# EAGLE board bb2 (EAGLE 6.5.0)
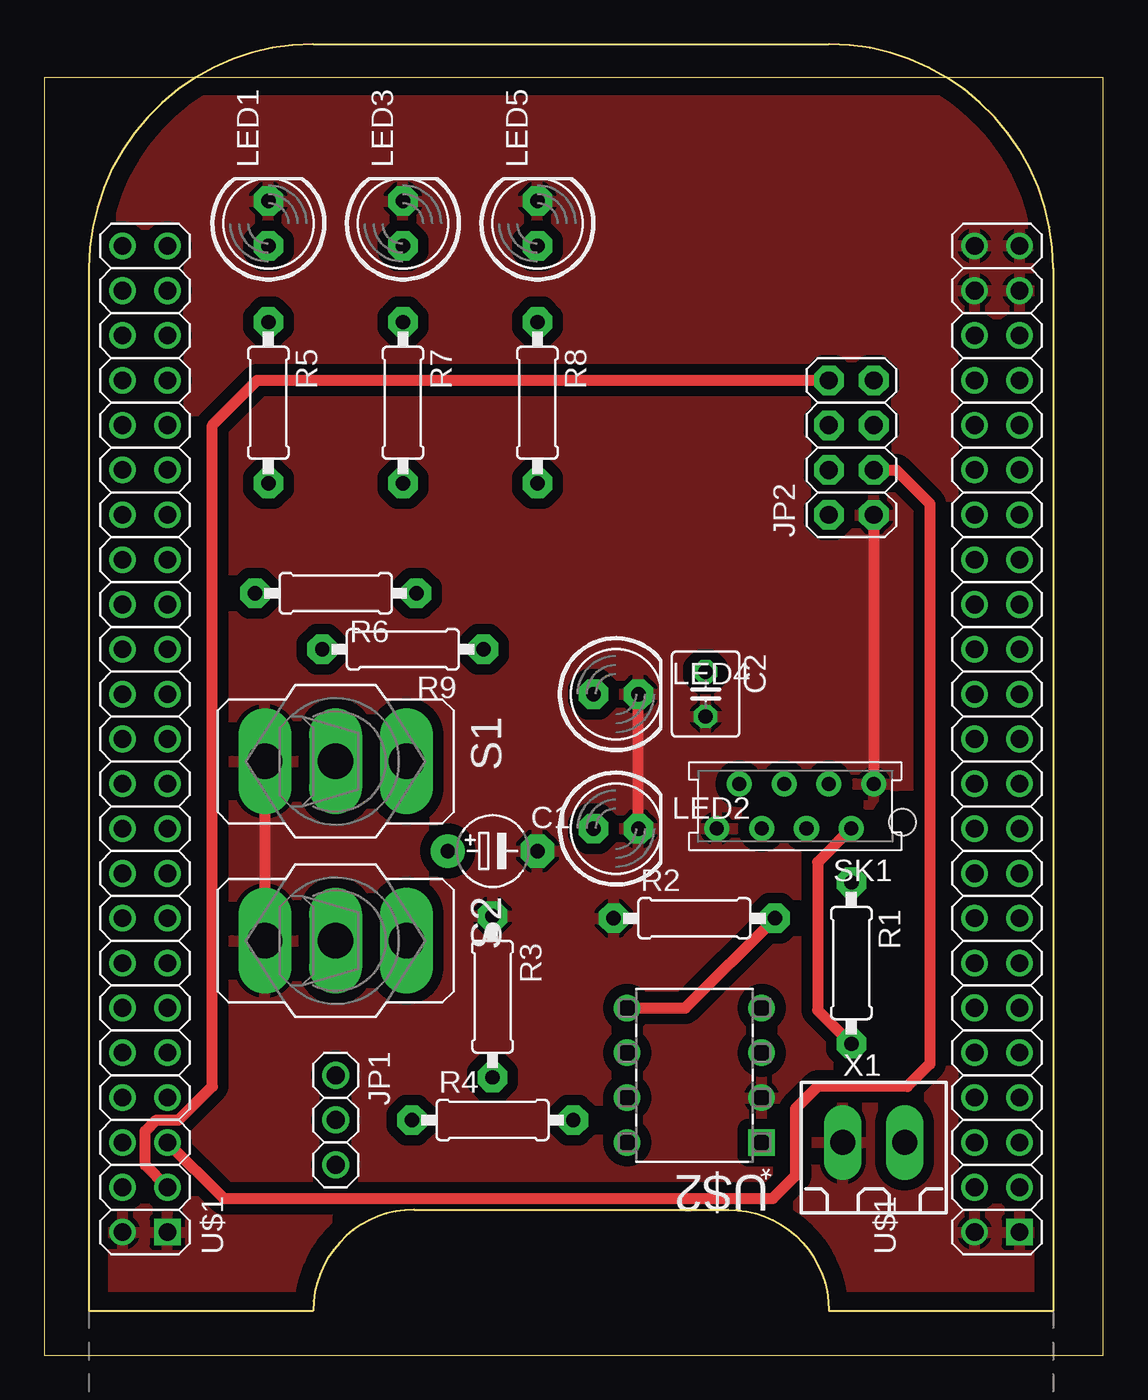
[diagram p0: board, top side]
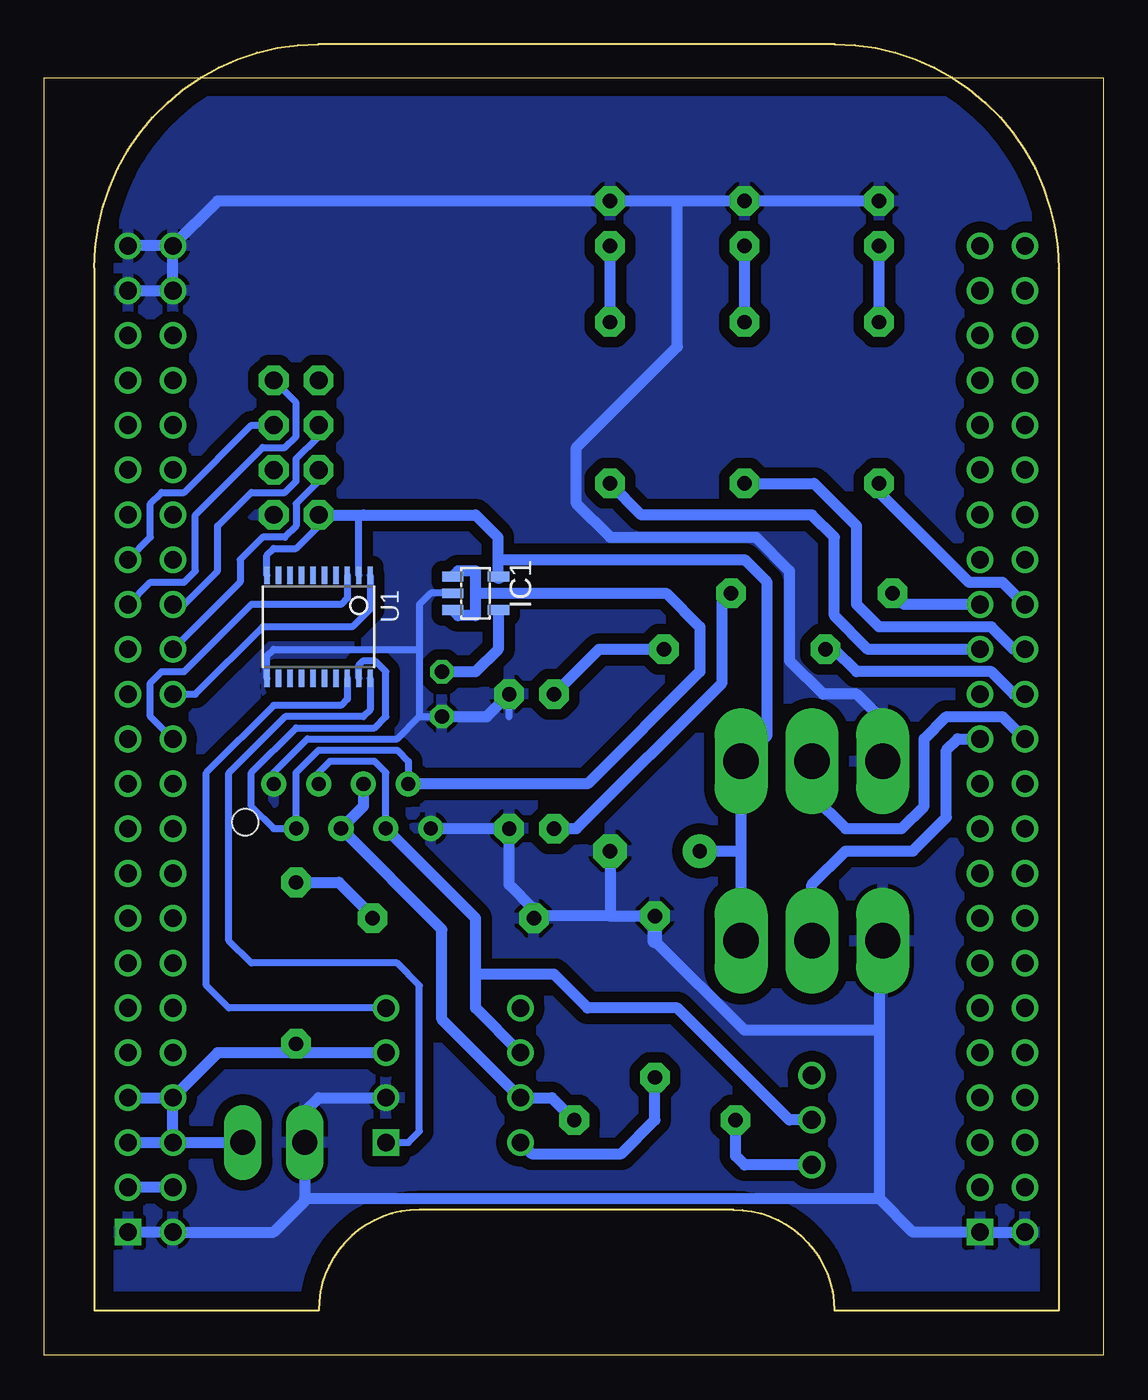
[diagram p1: board, bottom side, seen from below]

Size 59.99 x 72.38 mm. Coordinates in mm from the lower left corner, seen from the top.
Outline: 0,0 59.99,0 59.99,72.38 0,72.38 0,0
Copper layers (1*16): Top 0.035mm / dielectric 1.5mm / Bottom 0.035mm
Design rules "default": minimum track width 10mil, minimum drill 24mil, track to track 8mil, track to pad 8mil, pad to pad 8mil, via to via 8mil, smd to smd 8mil, copper to edge 40mil, drill to drill 8mil, minimum pad ring 10mil, minimum via ring 8mil, stop-mask expansion 4mil, vias tented up to drill 0mil, thermal gap 10mil

## Footprints (pad centres in the part's own frame; a part is rotated, then mirrored left to right if it is on the bottom)
E5-4 = drill 0.813 pad 1.905: + -2.54,0 | drill 0.813 pad 1.905 octagon: - 2.54,0
C025-040X050 = drill 0.813 octagon: 1 -1.27,0; 2 1.27,0
SOT23-5 = smd 0.55 x 1.2: 1 -0.95,-1.3; 2 0,-1.3; 3 0.95,-1.3; 4 0.95,1.3; 5 -0.95,1.3
1X03 = drill 1.016: 1 -2.54,0; 2 0,0; 3 2.54,0
2X04 = drill 1.016 pad 1.676 octagon: 1 -3.81,-1.27; 2 -3.81,1.27; 3 -1.27,-1.27; 4 -1.27,1.27; 5 1.27,-1.27; 6 1.27,1.27; 7 3.81,-1.27; 8 3.81,1.27
LED5MM = drill 0.813 pad 1.676 octagon: A -1.27,0; K 1.27,0
0207/9 = drill 0.813 pad 1.676 octagon: 1 -4.572,0; 2 4.572,0
320-916 = drill 2.007 long: 1 0,4.013; 2 0,0; 3 0,-4.013
AMP-215079-8 = drill 0.8 pad 1.422: 1 0,-1.27; 2 1.27,1.27; 3 2.54,-1.27; 4 3.81,1.27; 5 5.08,-1.27; 6 6.35,1.27; 7 7.62,-1.27; 8 8.89,1.27 | hole 1.5: -1.62,0.905
TSSOP20 = smd 0.305 x 0.991: 1 -2.925,-2.918; 2 -2.275,-2.918; 3 -1.625,-2.918; 4 -0.975,-2.918; 5 -0.325,-2.918; 6 0.325,-2.918; 7 0.975,-2.918; 8 1.625,-2.918; 9 2.275,-2.918; 10 2.925,-2.918; 11 2.925,2.918; 12 2.275,2.918; 13 1.625,2.918; 14 0.975,2.918; 15 0.325,2.918; 16 -0.325,2.918; 17 -0.975,2.918; 18 -1.625,2.918; 19 -2.275,2.918; 20 -2.925,2.918
BEAGLEBONE_SHIELD = drill 1 square: 1 4.445,19.05; 47 52.705,19.05 | drill 1: 2 1.905,19.05; 3 4.445,21.59; 4 1.905,21.59; 5 4.445,24.13; 6 1.905,24.13; 7 4.445,26.67; 8 1.905,26.67; 9 4.445,29.21; 10 1.905,29.21; 11 4.445,31.75; 12 1.905,31.75; 13 4.445,34.29; 14 1.905,34.29; 15 4.445,36.83; 16 1.905,36.83; 17 4.445,39.37; 18 1.905,39.37; 19 4.445,41.91; 20 1.905,41.91; 21 4.445,44.45; 22 1.905,44.45; 23 4.445,46.99; 24 1.905,46.99; 25 4.445,49.53; 26 1.905,49.53; 27 4.445,52.07; 28 1.905,52.07; 29 4.445,54.61; 30 1.905,54.61; 31 4.445,57.15; 32 1.905,57.15; 33 4.445,59.69; 34 1.905,59.69; 35 4.445,62.23; 36 1.905,62.23; 37 4.445,64.77; 38 1.905,64.77; 39 4.445,67.31; 40 1.905,67.31; 41 4.445,69.85; 42 1.905,69.85; 43 4.445,72.39; 44 1.905,72.39; 45 4.445,74.93; 46 1.905,74.93; 48 50.165,19.05; 49 52.705,21.59; 50 50.165,21.59; 51 52.705,24.13; 52 50.165,24.13; 53 52.705,26.67; 54 50.165,26.67; 55 52.705,29.21; 56 50.165,29.21; 57 52.705,31.75; 58 50.165,31.75; 59 52.705,34.29; 60 50.165,34.29; 61 52.705,36.83; 62 50.165,36.83; 63 52.705,39.37; 64 50.165,39.37; 65 52.705,41.91; 66 50.165,41.91; 67 52.705,44.45; 68 50.165,44.45; 69 52.705,46.99; 70 50.165,46.99; 71 52.705,49.53; 72 50.165,49.53; 73 52.705,52.07; 74 50.165,52.07; 75 52.705,54.61; 76 50.165,54.61; 77 52.705,57.15; 78 50.165,57.15; 79 52.705,59.69; 80 50.165,59.69; 81 52.705,62.23; 82 50.165,62.23; 83 52.705,64.77; 84 50.165,64.77; 85 52.705,67.31; 86 50.165,67.31; 87 52.705,69.85; 88 50.165,69.85; 89 52.705,72.39; 90 50.165,72.39; 91 52.705,74.93; 92 50.165,74.93
DIP254P762X432-8 = drill 0.991 square: 1 -7.62,7.62 | drill 0.991: 2 -7.62,5.08; 3 -7.62,2.54; 4 -7.62,0; 5 0,0; 6 0,2.54; 7 0,5.08; 8 0,7.62
180G-2 = drill 1.422 long: 1 -1.75,0; 2 1.75,0

## Placement (x,y rotation side)
C1  2.2u  [E5-4]  25.4,28.58 0 top
C2  470p  [C025-040X050]  37.47,37.47 270 top
IC1  MIC5219BM5  [SOT23-5]  35.56,43.18 270 bottom
JP1  [1X03]  16.51,13.34 270 top
JP2  [2X04]  45.72,51.44 90 top
LED1  [LED5MM]  12.7,64.14 90 top
LED2  [LED5MM]  32.38,29.84 0 top
LED3  [LED5MM]  20.32,64.14 90 top
LED4  [LED5MM]  32.38,37.47 0 top
LED5  [LED5MM]  27.94,64.14 90 top
R1  47k  [0207/9]  45.72,22.23 270 top
R2  47k  [0207/9]  36.83,24.77 0 top
R3  4.7k  [0207/9]  25.4,20.32 270 top
R4  120  [0207/9]  25.4,13.34 0 top
R5  47k  [0207/9]  12.7,53.97 270 top
R6  47k  [0207/9]  16.51,43.18 180 top
R7  47k  [0207/9]  20.32,53.97 270 top
R8  47k  [0207/9]  27.94,53.97 270 top
R9  47k  [0207/9]  20.32,40.01 180 top
S1  [320-916]  16.51,33.66 270 top
S2  [320-916]  16.51,23.49 270 top
SK1  [AMP-215079-8]  46.99,31.12 180 top
U1  [TSSOP20]  44.45,41.27 180 bottom
U$1  BEAGLEBONE_OUTLINE  [BEAGLEBONE_SHIELD]  2.54,-12.06 0 top
U$2  MCP2551-E/P  [DIP254P762X432-8]  33.02,19.69 180 top
X1  [180G-2]  46.99,12.07 0 top

## Library data of the parts
C1 C2 = resistor
IC1 = v-reg-micrel; MF: ALTERA CORPORATION; MPN: MIC5219BM5 TR; OC_FARNELL: 1100656; OC_NEWARK: 09J8939
JP1 JP2 LED1-LED5 R1-R9 U1 U$1 = adafruit
S1 S2 = switch
SK1 = jt-con-micromatch
U$2 = mcp2551; MPN: MCP2551-E/P; OC_FARNELL: 1439745; OC_NEWARK: 69K7603; PACKAGE: DIP-8; SUPPLIER: Microchip
X1 = con-weidmueller-sl35; OC_FARNELL: unknown; OC_NEWARK: unknown

## Nets
AIN0: U$1.85
DCAN1_RX: U1.3 U$1.70
DCAN1_TX: U1.1 U$1.72
GND: C1.- C2.2 IC1.2 JP2.1 LED1.K LED2.K LED3.K LED4.K LED5.K R2.1 R3.1 S1.3 S2.3 SK1.1 SK1.8 U1.11 U$1.1 U$1.2 U$1.47 U$1.48 U$1.89 U$1.90 U$1.91 U$1.92 U$2.2 X1.1
N$1: R1.1 R2.2 U$2.5
N$2: JP1.3 R4.1
N$3: R3.2 U$2.8
N$4: C2.1 IC1.4
N$5: R5.2 U$1.30
N$6: R6.2 U$1.29
N$7: R7.2 U$1.28
N$9: R9.2 U$1.26
N$10: LED5.A R8.1
N$11: S1.2 U$1.24
N$12: S2.2 U$1.23
N$13: R8.2 U$1.27
N$15: JP1.2 SK1.3 SK1.6 U$2.6
N$16: R4.2 SK1.4 SK1.5 U$2.7
N$19: LED2.A R6.1
N$20: LED1.A R5.1
N$21: LED3.A R7.1
N$22: LED4.A R9.1
RXD: U1.18 U$2.4
SPI_CE: JP2.3 U$1.5
SPI_CS: JP2.4 U$1.74
SPI_IRQ: JP2.8 U$1.3
SPI_MISO: JP2.7 U$1.75
SPI_MOSI: JP2.6 U$1.76
SPI_SCLK: JP2.5 U$1.77
TXD: U1.20 U$2.1
VDD: IC1.1 IC1.3 R1.2 SK1.2 SK1.7 U1.19 U$1.51 U$1.52 U$1.53 U$1.54 U$2.3 X1.2
VDD_3V3: C1.+ IC1.5 JP2.2 S1.1 S2.1 U1.2 U1.10
VDD_3V3EXP: U$1.49 U$1.50

## Tracks (layer width: path | path; a pad name or v marks a point on that pad's centre or on a via)
DCAN1_RX
  Bottom 0.406: U$1.70 53.98,36.2 53.98,38.1 53.34,38.73 52.07,38.73 48.26,42.55 43.18,42.55 42.82,42.9 U1.3
DCAN1_TX
  Bottom 0.406: U$1.72 51.43,37.47 47.63,41.27 42.54,41.27 41.52,42.3 U1.1
GND
  Top 0.61: JP2.1 SK1.1 | LED2.K LED4.K | S1.3 S2.3
  Bottom 0.406: 33.66,36.2 LED4.K | 38.74,36.2 40.01,34.92 45.09,34.92 46.99,33.02 SK1.1 | IC1.2 38.1,43.18 38.74,42.55 38.74,40.01 | 38.74,40.01 38.74,36.2 | 38.74,36.2 C2.2 | U1.11 47.38,39.62 46.99,40.01 38.74,40.01
  Bottom 0.61: LED1.K LED3.K 24.13,65.41 | 24.13,65.41 LED5.K 50.16,65.41 U$1.92 U$1.91 | SK1.8 LED2.K 33.66,26.67 32.26,25.27 | 27.94,24.89 32.13,24.89 | U$2.2 44.45,14.61 45.24,13.82 X1.1 45.24,8.89 | C1.- 27.94,24.89 | 27.94,24.89 26.04,24.89 | U$1.47 U$1.48 46.99,6.98 45.24,8.73 45.24,8.89 | 52.71,62.23 U$1.90 U$1.89 | U$1.2 U$1.1 10.8,6.98 12.7,8.89 | S1.3 12.5,35.99 13.97,37.47 15.88,37.47 17.78,39.37 17.78,44.45 19.69,46.35 27.94,46.35 29.84,48.26 29.84,51.44 24.13,57.15 24.13,65.41 | 25.4,23.49 20.32,18.41 12.7,18.41 | S2.3 12.7,23.29 12.7,18.41 | 45.24,8.89 12.7,8.89 | 12.7,18.41 12.7,8.89 | C2.2 34.93,36.2 LED4.K
  Bottom 0.813: 32.13,24.89 R2.1 32.26,25.27 | R3.1 26.04,24.89 25.4,24.26 25.4,23.49
  pour Top (isolate 0.61): -3.81,80.01 -3.81,0 79.38,0 79.38,80.01
  pour Bottom (isolate 0.61): -7.62,77.47 -7.62,-0.63 63.5,-0.63 63.5,78.11 -7.62,78.11
N$1
  Top 0.61: U$2.5 36.32,19.69 R2.2
  Bottom 0.61: 41.4,24.89 43.31,26.8 R1.1
  Bottom 0.813: R2.2 41.4,24.89
N$2
  Bottom 0.61: JP1.3 20.32,10.8 20.83,11.3 R4.1
N$3
  Bottom 0.61: U$2.8 32.38,11.43 27.3,11.43 25.4,13.34 R3.2
N$4
  Bottom 0.61: C2.1 35.56,38.73 34.26,40.03 IC1.4
N$5
  Bottom 0.61: R5.2 12.7,48.89 11.43,47.62 7.62,43.81 5.71,43.81 U$1.30
N$6
  Bottom 0.61: U$1.29 11.3,42.55 R6.2
N$7
  Bottom 0.61: U$1.28 5.08,40.01 6.35,41.27 12.7,41.27 13.97,42.55 13.97,46.99 16.38,49.4 R7.2
N$9
  Bottom 0.61: U$1.26 5.08,37.47 6.35,38.73 13.97,38.73 15.24,40.01 R9.2
N$10
  Bottom 0.61: R8.1 LED5.A
N$11
  Bottom 0.61: S1.2 16.51,31.75 14.61,29.84 11.43,29.84 10.16,31.12 10.16,34.92 8.89,36.2 5.71,36.2 U$1.24
N$12
  Bottom 0.61: S2.2 16.51,26.67 14.61,28.58 10.8,28.58 8.89,30.48 8.89,34.29 8.26,34.92 U$1.23
N$13
  Bottom 0.61: U$1.27 13.34,40.01 15.24,41.91 15.24,46.35 16.51,47.62 26.16,47.62 R8.2
N$15
  Bottom 0.406: SK1.6 40.64,33.02 41.27,33.66 43.82,33.66 44.45,33.02 SK1.3
  Bottom 0.61: U$2.6 35.56,19.69 35.56,21.59 | 35.56,21.59 35.56,24.77 SK1.6 | JP1.2 17.78,13.34 24.13,19.69 29.21,19.69 31.12,21.59 35.56,21.59
N$16
  Bottom 0.61: SK1.5 41.91,31.12 SK1.4 37.47,24.13 37.47,19.05 U$2.7 31.24,14.61 R4.2
N$19
  Bottom 0.61: LED2.A 29.84,29.84 21.59,38.1 21.59,42.67 R6.1
N$20
  Bottom 0.61: R5.1 LED1.A
N$21
  Bottom 0.61: R7.1 LED3.A
N$22
  Bottom 0.61: R9.1 28.58,40.01 LED4.A
RXD
  Bottom 0.406: U$2.4 49.53,19.69 50.8,20.95 50.8,33.02 46.99,36.83 43.18,36.83 42.82,37.19 U1.18
SPI_CE
  Top 0.61: JP2.3 48.26,50.17 50.16,48.26 50.16,16.51 48.9,15.24 43.82,15.24 42.54,13.97 42.54,10.16 41.27,8.89 10.16,8.89 U$1.5
SPI_CS
  Bottom 0.406: JP2.4 44.45,49.53 45.72,48.26 45.72,46.99 46.35,46.35 47.63,46.35 48.9,45.09 48.9,43.81 U$1.74
SPI_IRQ
  Top 0.61: U$1.3 5.71,10.8 5.71,12.7 6.35,13.34 7.62,13.34 9.52,15.24 9.52,52.7 12.07,55.25 JP2.8
SPI_MISO
  Bottom 0.406: U$1.75 53.98,43.81 52.07,43.81 51.43,44.45 51.43,47.62 47.63,51.44 46.35,51.44 45.72,52.07 45.72,53.97 JP2.7
SPI_MOSI
  Bottom 0.406: U$1.76 52.07,42.55 50.16,44.45 50.16,46.99 48.26,48.89 46.35,48.89 45.72,49.53 45.72,50.8 44.45,52.07 JP2.6
SPI_SCLK
  Bottom 0.406: U$1.77 53.98,46.35 53.98,48.26 53.34,48.89 52.07,48.89 48.26,52.7 JP2.5
TXD
  Bottom 0.406: U$2.1 39.37,12.07 38.74,12.7 38.74,20.95 40.01,22.23 48.26,22.23 49.53,23.49 49.53,33.01 46.35,36.2 41.91,36.2 41.52,36.58 U1.20
VDD
  Top 0.61: SK1.2 43.82,27.94 43.82,19.56 R1.2
  Bottom 0.406: SK1.7 39.37,33.66 40.01,34.29 44.45,34.29 45.72,33.02 SK1.2 46.99,29.84 48.26,31.12 48.26,33.02 45.72,35.56 41.27,35.56 40.64,36.2 40.64,38.73 41.27,39.37 41.91,39.37 42.18,39.1 U1.19
  Bottom 0.61: U$1.53 U$1.54 | U$1.52 U$1.54 | U$1.51 U$1.52 | U$1.52 X1.2 | 35.56,43.18 35.56,41.91 36.54,41.91 IC1.3 | 35.56,43.18 24.77,43.18 22.86,41.27 22.86,38.73 29.21,32.38 SK1.7 | 35.56,43.18 35.56,44.45 36.54,44.45 IC1.1 | U$2.3 45.85,17.15 | 45.85,17.15 R1.2 | 45.85,17.15 50.16,17.15 U$1.54
VDD_3V3
  Bottom 0.406: IC1.5 33.9,44.13 | U1.10 47.38,45.34 46.99,45.72 45.72,45.72 44.45,46.99 JP2.2 | U1.2 42.18,47.36 41.91,47.62
  Bottom 0.61: S2.1 20.52,28.58 | 20.52,28.58 S1.1 19.05,35.13 19.05,43.81 20.32,45.09 34.29,45.09 | C1.+ 20.52,28.58 | JP2.2 41.91,47.62 35.56,47.62 34.29,46.35 34.29,45.09 | 34.29,45.09 34.29,44.16
  Bottom 0.813: 34.29,44.16 IC1.5
VDD_3V3EXP
  Bottom 0.61: U$1.50 U$1.49

## Text on the board
tTest: IA | 2014 | ARES ENSEA | DIPOLE